# Altium PCB PCB1.PcbDoc
Units mil, origin at the board's own origin, x right, y up, seen from the top; angles counter-clockwise.
Board outline 3937.01 x 1968.5 mil, 2 copper layers (Top Layer, Bottom Layer); 61 components, 56 nets, 212 pads, 57 vias.
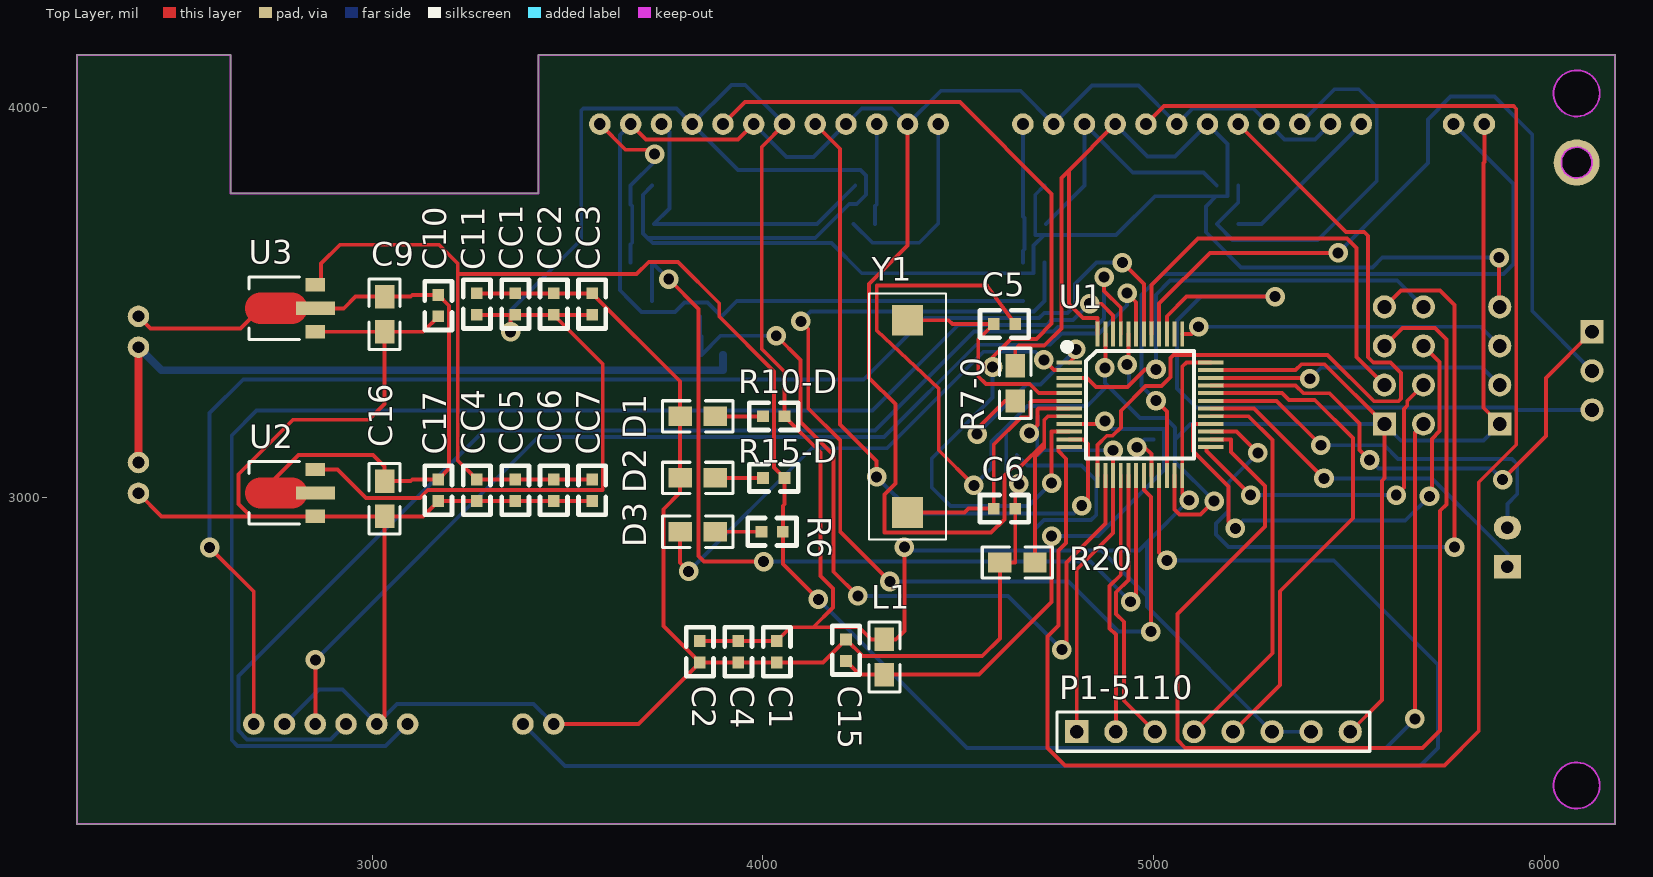
[diagram p0: Top Layer view]
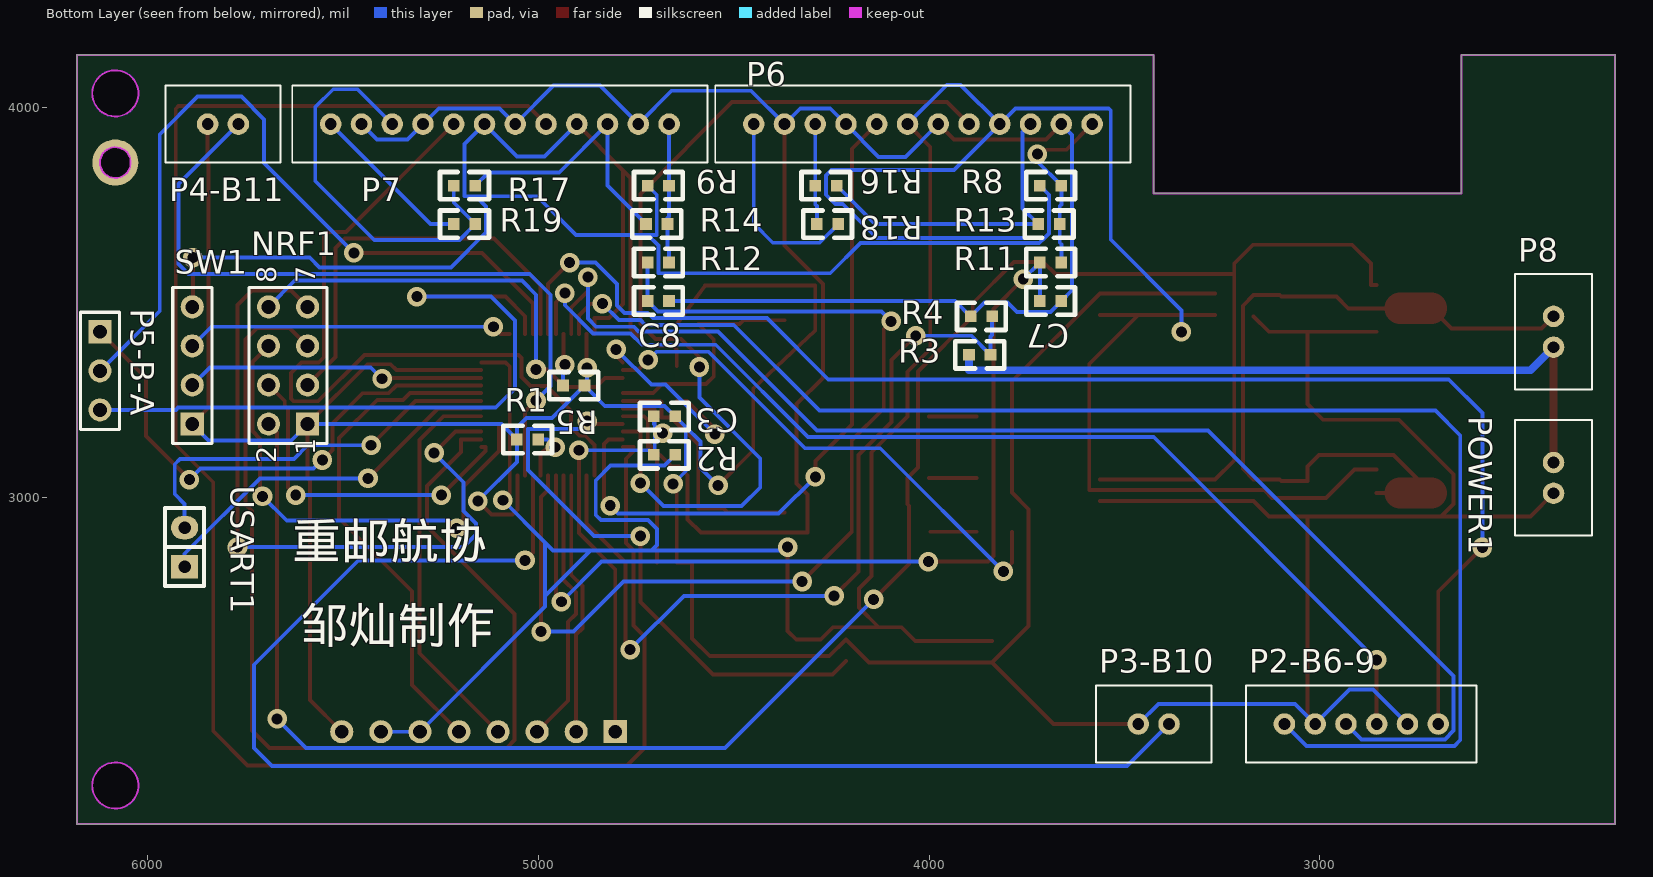
[diagram p1: Bottom Layer view, seen from below]

## Layer stack, top to bottom
Top Solder: solder mask 0.4, Solder Resist, Dk 3.5
Top Layer: signal copper 1.4
Dielectric 1: dielectric 12.6, FR-4, Dk 4.8
Bottom Layer: signal copper 1.4
Bottom Solder: solder mask 0.4, Solder Resist, Dk 3.5

## Board outline
2244.09,2165.35 2244.09,4133.86 2637.8,4133.86 2637.8,3779.53 3425.2,3779.53 3425.2,4133.86 6181.1,4133.86 6181.1,2165.35

## Design rules (kind name [scope] priority, off if disabled: settings)
Clearance [All] p1: gap=7
PolygonConnect [All] p1: connectstyle=Relief reliefconductorwidth=10 reliefentries=4 polygonreliefangle="90 Angle" airgapwidth=10
RoutingVias [All] p1: holewidth=28 width=50 viastyle="Through Hole" minholewidth=28 minwidth=50 maxholewidth=28 maxwidth=50
SolderMaskExpansion [All] p1: expansion=4
UnpouredPolygon [All] p1: allowunpoured=FALSE
Width [All] p1: maxlimit=30 minlimit=10 preferedwidth=30
29 further rules are at their usual default settings.

## Components (designator, comment, footprint, x,y, rotation, side; value= is the part's Value field where it differs from the comment)
C1 "cap" 0603c 4035.43,2578.74 r90 top
C2 "cap" 0603c 3838.58,2578.74 r90 top
C3 "cap" 0603c 4649.72,3208.66 r0 bottom
C4 "cap" 0603c 3937.01,2578.74 r90 top
C5 "cap" 0603c 4645.67,3444.88 r180 top
C6 "cap" 0603c 4645.67,2972.44 r180 top
C7 "cap" 0603c 3661.42,3503.94 r0 bottom
C8 "cap" 0603c 4665.35,3503.94 r0 bottom
C9 "cap" 0805 3031.5,3425.2 r90 top
C10 "cap" 0603c 3169.29,3464.57 r90 top
C11 "cap" 0603c 3267.72,3523.62 r270 top
C15 "cap" 0603c 4212.6,2637.8 r270 top
C16 "cap" 0805 3031.5,2952.76 r90 top
C17 "cap" 0603c 3169.29,2992.13 r90 top
CC1 "cap" 0603c 3366.14,3523.62 r270 top
CC2 "cap" 0603c 3464.57,3523.62 r270 top
CC3 "cap" 0603c 3562.99,3523.62 r270 top
CC4 "cap" 0603c 3267.72,2992.13 r90 top
CC5 "cap" 0603c 3366.14,2992.13 r90 top
CC6 "cap" 0603c 3464.57,2992.13 r90 top
CC7 "cap" 0603c 3562.99,2992.13 r90 top
D1 "LED0" 0805 3877.95,3208.66 r180 top
D2 "LED0" 0805 3877.95,3051.18 r180 top
D3 "LED0" 0805 3877.95,2913.39 r180 top
L1 "Inductor" 0805 4311.02,2637.8 r270 top
NRF1 "Header 4X2" HDR2X4 5590.55,3188.98 r90 bottom
P1-5110 "Header 8" HDR1X8 4803.15,2401.57 r0 top
P2-B6-9 "Header 6" 6p 2893.7,2421.26 r0 bottom
P3-B10 "Header 2" 2p 3425.2,2421.26 r0 bottom
P4-B11 "Header 2" 2p 5807.09,3956.69 r0 bottom
P5-B-A "Header 3" HDR1X3 6122.05,3425.2 r270 bottom
P6 "Header 12" 12p 4015.75,3956.69 r0 bottom
P7 "Header 12" 12p 5098.43,3956.69 r0 bottom
P8 "Header 2" 2p 2401.57,3425.2 r90 bottom
POWER1 "CON2" 2p 2401.57,3051.18 r90 bottom
R1 "res" 0603c 5000,3149.61 r0 bottom
R2 "10K" 0603c 4704.72,3110.24 r180 bottom
R3 "10K" 0603c 3842.64,3366.14 r0 bottom
R4 "10K" 0603c 3893.58,3464.57 r180 bottom
R5 "res" 0603c 4881.89,3287.4 r0 bottom
R6 "1K" 0603c 3996.06,2913.39 r0 top
R7-0 "0R" 0805 4645.67,3248.03 r90 top
R8 "10K" 0603c 3661.42,3799.21 r0 bottom
R9 "10K" 0603c 4665.35,3799.21 r0 bottom
R10-D "res" 0603c 4055.12,3208.66 r180 top
R11 "1K" 0603c 3661.42,3602.36 r0 bottom
R12 "1K" 0603c 4665.35,3602.36 r0 bottom
R13 "10K" 0603c 3720.47,3700.79 r180 bottom
R14 "10K" 0603c 4724.41,3700.79 r180 bottom
R15-D "res" 0603c 4055.12,3051.18 r180 top
R16 "10K" 0603c 4291.34,3799.21 r180 bottom
R17 "10K" 0603c 5216.54,3799.21 r180 bottom
R18 "10K" 0603c 4232.28,3700.79 r0 bottom
R19 "10K" 0603c 5216.54,3700.79 r180 bottom
R20 "0R" 0805 4606.3,2834.65 r0 top
SW1 "Header 4" HDR1X4 5885.83,3188.98 r90 bottom
U1 "STM32F103C8T6" LQFP48S 4783.46,3346.46 r0 top
U2 "XC6203E" SOT-89 2854.33,2952.76 r90 top
U3 "XC6203E" SOT-89 2854.33,3425.2 r90 top
USART1 "CON2" SIP2 5905.51,2874.02 r90 bottom
Y1 "5032xtal" 晶振 4370.08,3208.66 r90 top

## Footprints (in the part's own frame and the unit in brackets; to place one, negate y for a bottom-side part, rotate by r counter-clockwise, add the part's x,y. Pads: shape width x height; smd on the part's side, far side on the other; paste and mask are expansions set on the pad)
2p [mil]
  round 55 hole 30: 1(-39.37,0) 2(39.37,0)
  silkscreen extent -148,-98 148,98
6p [mil]
  round 55 hole 30: 1(-196.85,0) 2(-118.11,0) 3(-39.37,0) 4(39.37,0) 5(118.11,0) 6(196.85,0)
  silkscreen extent -295,-98 295,98
12p [mil]
  round 55 hole 30: 1(-433.07,0) 2(-354.33,0) 3(-275.59,0) 4(-196.85,0) 5(-118.11,0) 6(-39.37,0) 7(39.37,0) 8(118.11,0) 9(196.85,0) 10(275.59,0) 11(354.33,0) 12(433.07,0)
  silkscreen extent -531,-98 531,98
0603c [mil]
  rect 30x30 smd: 1(0,0) 2(55,0)
  silkscreen extent -35,-35 90,35
0805 [mil]
  rect 60x50 smd: 1(0,0) 2(90,0)
  silkscreen extent -45,-40 135,40
HDR1X3 [mm] "Connector; Header; 3 Position"
  rect 1.5x1.5 hole 0.9: 1(0,0)
  round 1.5 hole 0.9: 2(2.54,0) 3(5.08,0)
  silkscreen extent -1.27,-1.27 6.35,1.27
HDR1X4 [mm] "Connector; Header; 4 Position"
  rect 1.5x1.5 hole 0.9: 1(0,0)
  round 1.5 hole 0.9: 2(2.54,0) 3(5.08,0) 4(7.62,0)
  silkscreen extent -1.27,-1.27 8.89,1.27
HDR1X8 [mm] "Connector; Header; 8 Position"
  rect 1.5x1.5 hole 0.9: 1(0,0)
  round 1.5 hole 0.9: 2(2.54,0) 3(5.08,0) 4(7.62,0) 5(10.16,0) 6(12.7,0) 7(15.24,0) 8(17.78,0)
  silkscreen extent -1.27,-1.27 19.05,1.27
HDR2X4 [mm] "Connector; Header; 4x2 Position"
  rect 1.5x1.5 hole 0.9: 1(0,0)
  round 1.5 hole 0.9: 2(0,2.54) 3(2.54,0) 4(2.54,2.54) 5(5.08,0) 6(5.08,2.54) 7(7.62,0) 8(7.62,2.54)
  silkscreen extent -1.27,-1.27 8.89,3.81
LQFP48S [mil] "DPIN-0.5"
  rect 65x10 smd: 1(0.43,0.29) 2(0.43,-19.39) 3(0.43,-39.08) 4(0.43,-58.76) 5(0.43,-78.45) 6(0.43,-98.13) 7(0.43,-117.82) 8(0.43,-137.5) 9(0.43,-157.19) 10(0.43,-176.87) 11(0.43,-196.56) 12(0.43,-216.24) 25(362.63,-216.24) 26(362.63,-196.56) 27(362.63,-176.87) 28(362.63,-157.19) 29(362.63,-137.5) 30(362.63,-117.82) 31(362.63,-98.13) 32(362.63,-78.45) 33(362.63,-58.76) 34(362.63,-39.08) 35(362.63,-19.39) 36(362.63,0.29)
  rect 10x65 smd: 13(73.26,-289.08) 14(92.95,-289.08) 15(112.63,-289.08) 16(132.32,-289.08) 17(152,-289.08) 18(171.69,-289.08) 19(191.37,-289.08) 20(211.06,-289.08) 21(230.74,-289.08) 22(250.43,-289.08) 23(270.11,-289.08) 24(289.8,-289.08) 37(289.8,73.13) 38(270.11,73.13) 39(250.43,73.13) 40(230.74,73.13) 41(211.06,73.13) 42(191.37,73.13) 43(171.69,73.13) 44(152,73.13) 45(132.32,73.13) 46(112.63,73.13) 47(92.95,73.13) 48(73.26,73.13)
  silkscreen extent -10,-246 319,46
SIP2 [mil]
  rect 60x70 hole 32: 1(-50,0)
  oval 60x70 hole 32: 2(50,0)
  silkscreen extent -100,-50 100,50
SOT-89 [mil]
  rect 34x50 smd: 1(0,0) 3(120,0)
  rect 34x100 smd: 2(60,0)
  Top Layer lines w80: 60,140 60,60
  silkscreen extent -20,40 140,170
晶振 [mm]
  rect 2x2 smd: 1(-6.25,0) 2(6.25,0)
  silkscreen extent -8,-2.5 8,2.5

## Part data
D1 D2 D3: "Typical INFRARED GaAs LED"
NRF1: "Header, 4-Pin, Dual row"
P1-5110: "Header, 8-Pin"
P2-B6-9: "Header, 6-Pin"
P3-B10 P4-B11 P8: "Header, 2-Pin"
P5-B-A: "Header, 3-Pin"
P6 P7: "Header, 12-Pin"
R2 R3 R4 R6 R7-0 R8 R9 R11 R12 R13 R14 R16 R17 R18 R19 R20: library part RES
SW1: "Header, 4-Pin"
U2 U3: library part XC6203

## Free pads (board coordinates)
  round 118.11 hole 118.11: 0(6082.68,4035.43) 1(6082.68,2263.78)
  round 118.11 hole 78.74: 2(6082.68,3858.27)

## Via types
v1: diameter 50, hole 28, Top Layer to Bottom Layer, 57 vias

## Nets (pads, with @x,y where several pads share a name; then routed paths per layer and width w, separated by ;. In a path a pad name is that pad's centre, name@x,y a point inside that pad or via, vN(x,y) a via of type N, cw(c..) or ccw(c..) an arc to the next point about the centre after c; other vN are vias at no path point)
3.3_2: CC4.2 CC5.2 CC6.2 CC7.2 NRF1.2 R6.2 R15-D.1 U3.3 | length 5399.1
  Top Layer w10: U3.3 2869,3545.2 2869,3600 2917,3648 3171,3648 3219,3600 3219,3573 ; CC7.2 CC6.2 CC5.2 CC4.2 3219,3095.84 3219,3573 ; v1(4142,2740) 4051.06,2830.94 R6.2 4051.06,2980 4055.12,2984.05 R15-D.1 4028,3078.3 4028,3324 3888.24,3463.76 3888.24,3498.18 3782.14,3604.28 3707.72,3604.28 3676.45,3573 3219,3573 ; v1(5668.73,2434.17) 5668.73,3167.15 NRF1.2
  Bottom Layer w10: v1(4142,2740) 4522,2360 5594.55,2360 v1(5668.73,2434.17)
3.3V: C1.2 C2.2 C4.2 C11.2 CC1.2 CC2.2 CC3.2 L1.1 P1-5110.6 P1-5110.7 P6.4 P6.7 P7.4 P7.7 R2.2 R7-0.2 R8.2 R9.2 R10-D.1 SW1.4 U1.24 U1.36 U1.48 U2.3 | length 13739.9
  Top Layer w10: U2.3 2911.24,3072.76 2984,3000 3122,3000 3142,3020 3590,3020 3590,3343.19 CC2.2 ; C11.2 CC1.2@3354,3468.62 ; v1(3354,3425) CC1.2@3354,3468.62 ; CC3.2 CC2.2 ; C2.2 C4.2 C1.2 4070.69,2669 4128.69,2669 ; P6.7 3997,3898.57 3997,3381 4055.12,3322.88 R10-D.1 4146.9,3116.88 4146.9,2800 4179,2767.9 4179,2719.31 4128.69,2669 ; v1(4362,2874) 4362,2659.8 4340,2637.8 L1.1 4277.2,2637.8 4246,2669 4128.69,2669 ; R7-0.2 4645.67,3380 4655.67,3390 4720,3390 4764,3434 4764,3819.12 4783,3838.12 ; U1.48 4856.72,3460 4819,3460 4783,3496 4783,3838.12 ; P7.4 4783,3838.12 ; v1(5091,2994) 5073.26,3011.74 U1.24 5073.26,3336.01 5084,3346.75 U1.36 ; v1(5884,3615) 5884,3490.8 SW1.4 ; CC1.2@3354,3468.62 CC1.2 CC2.2
  Bottom Layer w10: v1(3354,3425) 3354,3480 3535,3661 3535,3992 3540,3997 3778.59,3997 P6.4 ; R8.2 3693,3775.79 3693,3677 3705,3665 ; P6.7 3954.81,4057 3919.21,4057 P6.4 ; v1(4362,2874) 4371.02,2864.98 4867.02,2864.98 4983,2749 ; R2.2 4676.96,3083 4815,3083 4853,3045 4853,2956 4840,2943 4719,2943 4696,2920 4696,2879 4710,2865 4962,2865 4983,2886 ; R9.2 4697,3775.86 4697,3673 4720,3673 ; P7.4 4984.27,3874 5055.1,3874 P7.7 5189,3905.49 5189,3772 5160,3772 ; v1(5091,2994) 4983,2886 ; P1-5110.7 P1-5110.6 4983,2721.72 4983,2749 ; v1(5884,3615) 5585.11,3615 5560.08,3589.97 5224.03,3589.97 5134,3680 5134,3746 5160,3772 ; 3705,3665 4134,3665 4221,3752 4240,3752 4264,3776 4264,3825 4250,3839 3936.59,3839 P6.4 ; 3705,3665 3718,3652 4176,3652 4253,3575 4693,3575 4693,3646 4720,3673 ; 4720,3673 4904,3673 5003,3772 5160,3772 ; 4983,2749 4983,2886
ADC_KEY_L: C7.2 R11.2 U1.18 | length 2382.4
  Top Layer w10: v1(3759,3559.78) 3835,3483.78 3835,2851 3849,2837 v1(4002,2837) ; v1(4941,2734.15) 4955.15,2748.3 U1.18
  Bottom Layer w10: C7.2 R11.2 v1(3759,3559.78) ; v1(4002,2837) 4838.15,2837 v1(4941,2734.15)
ADC_KEY_R: C8.2 R12.2 U1.19 | length 2631.7
  Top Layer w10: v1(4097,3452) 4116,3433 4116,3229 4198,3147 4198,2913 v1(4325,2786) ; U1.19 4974.83,3020 4993,3001.83 v1(4993,2658)
  Bottom Layer w10: v1(4097,3452) 4121.94,3476.94 4693.35,3476.94 C8.2 R12.2 ; v1(4325,2786) 4782.18,2786 4910.18,2658 v1(4993,2658)
ADC_PITCH: P7.5 U1.12 | length 4587.9
  Top Layer w10: U1.12 4756,3130.21 4756,3120.24 4776,3100.24 4776,2885 4756,2865 4756,2673 4728,2645 4728,2360 4773,2315 5744,2315 5832,2403 5832,3040 5928,3136 5928,3996 5921,4003 5026.62,4003 P7.5
ADC_POWER: R3.1 R4.2 U1.14 | length 2135.3
  Top Layer w10: v1(4034,3415) 4096.56,3352.44 4096.56,3193.87 4181,3109.43 4181,2811 v1(4243,2749) ; v1(4765,2611.5) 4776.5,2623 4776.5,2835.08 4876.41,2934.99 U1.14
  Bottom Layer w10: R4.2 3838.58,3417.06 3842.64,3413 R3.1 3891.5,3415 v1(4034,3415) ; v1(4243,2749) 4627.5,2749 v1(4765,2611.5)
ADC_ROLL: P7.8 U1.13 | length 1984.1
  Top Layer w10: U1.13 4856.72,3135.72 4880,3159 4895,3159 4916,3180 4916,3223 4979,3286 5020,3286 5043,3309 5043,3358 5051,3366 5445,3366 5563.55,3247.45 5626.45,3247.45 5633,3254 5633,3320 5606,3347 5562.01,3347 5549,3360.01 5549,3670.95 5538.95,3681 5492.23,3681 P7.8
ADC_THR: P6.5 U1.10 | length 2406.1
  Top Layer w10: P6.5 3953.95,4013 4504,4013 4739,3778 4739,3445.88 4700.12,3407 4635,3407 4588,3360 v1(4588,3335) ; v1(4739,3038) 4739,3169.58 U1.10
  Bottom Layer w10: v1(4588,3335) 4588,3257 4432,3101 4432,3027 4480,2979 4680,2979 v1(4739,3038)
ADC_YAW: P6.8 U1.11 | length 1757.6
  Top Layer w10: P6.8 4196.96,3893.59 4196.96,3188.04 4291,3094 v1(4291,3054) ; U1.11 4820,3149.9 4832,3137.9 4832,2996.08 v1(4815.92,2980)
  Bottom Layer w10: v1(4291,3054) 4385,2960 4795.92,2960 v1(4815.92,2980)
AGND: C7.1 C8.1 P6.2 P6.6 P6.9 P6.11 P7.2 P7.6 P7.9 P7.11 R4.1 R20.2 U1.8 | length 5815
  Top Layer w10: P6.2 3701.11,3917 3936.69,3917 P6.6 ; P6.11 4370.08,3646.09 4271.65,3547.66 4271.65,3307.35 4339,3240 4339,3036.5 4311.5,3009 4311.5,2911 4584,2911 4618,2945 4618,3057.85 4640,3079.85 4658.85,3079.85 4720,3141 ; R20.2 4696.3,3105.3 4720,3129 4720,3141 ; U1.8 4730,3208.95 4720,3198.95 4720,3141
  Bottom Layer w10: P6.2 3634,3929.27 3634,3531.36 C7.1 3689.36,3476 3775,3476 3799,3500 3858.15,3500 R4.1 3932.95,3503.94 C8.1 ; P6.6 4060.07,3873 4128.91,3873 P6.9 4252.91,3997 4329.77,3997 P6.11 4455.39,4042 4658.79,4042 P7.2 4842.4,4055 4960.75,4055 P7.6 5099.36,3997 5254.97,3997 P7.9 5334.97,3917 5413.06,3917 P7.11
AVDD: C15.2 L1.2 U1.9 | length 1504.1
  Top Layer w10: C15.2 4247.6,2547.8 L1.2 4552.8,2547.8 4739,2734 v1(4739,2902) ; U1.9 4867.66,3189.27 v1(4875,3196.61)
  Bottom Layer w10: v1(4739,2902) 4858,2902 5027,3071 5027,3176.61 4895,3176.61 v1(4875,3196.61)
BAT: P8.1 POWER1.2 R3.2 | length 1855.2
  Top Layer w20: POWER1.2 P8.1
  Bottom Layer w20: P8.1 2460.63,3326.77 3897.64,3326.77 R3.2
BOOT0: R5.2 U1.44 | length 135.6
  Top Layer w10: v1(4932,3341) 4935.46,3344.46 U1.44
  Bottom Layer w10: v1(4932,3341) 4936.89,3336.11 R5.2
BOOT1: R1.1 U1.20 | length 150.8
  Top Layer w10: v1(4957,3129.61) 4977,3129.61 4994.52,3112.09 U1.20
  Bottom Layer w10: v1(4957,3129.61) 4977,3149.61 R1.1
CE: P1-5110.2 U1.16 | length 674.4
  Top Layer w10: P1-5110.2 4903.15,2649.85 4887,2666 4887,2774 4915.78,2802.78 U1.16
CLK: P1-5110.5 U1.32 | length 1290.1
  Top Layer w10: U1.32 5328.82,3268.01 5346.09,3250.74 5412.26,3250.74 5510,3153 5510,2948 5323,2761 5323,2521.42 P1-5110.5
DC: P1-5110.3 U1.17 | length 709.9
  Top Layer w10: U1.17 4935.46,2789.93 4904,2758.46 4904,2703 4924,2683 4924,2480.72 P1-5110.3
DGND: C1.1 C2.1 C3.1 C4.1 C5.1 C6.1 C9.1 C10.1 C11.1 C15.1 C16.1 C17.1 CC1.1 CC2.1 CC3.1 CC4.1 CC5.1 CC6.1 CC7.1 D1.2 D2.2 NRF1.1 P1-5110.8 P2-B6-9.2 P2-B6-9.5 P3-B10.2 P4-B11.2 POWER1.1 R1.2 R5.1 R20.1 SW1.1 U1.23 U1.35 U1.47 U2.1 U3.1 | length 12193.7
  Top Layer w10: POWER1.1 2460.63,2952.76 2689.24,2952.76 ; U3.1 C9.1 ; P2-B6-9.5 3031.5,2440.94 C16.1 ; C10.1 3129.92,3425.2 C9.1 ; C11.1 CC1.1 CC2.1 CC3.1 3787.95,3298.66 D1.2 D2.2 3787.95,3013.95 3745,2971 3745,2672.32 C2.1 ; P3-B10.2 3681.1,2421.26 C2.1 ; CC7.1 CC6.1 CC5.1 CC4.1 C17.1 3129.92,2952.76 C16.1 ; v1(4540,3032) 4450,3122 4450,3280 4291.34,3427.84 4291.34,3543.31 4573.31,3543.31 C5.1 ; v1(4655,3036) 4645.67,3026.67 C6.1 4645.67,2834.65 R20.1 4606.3,2640 4561.3,2595 4255.39,2595 C15.1 4153.54,2578.74 C1.1 C4.1 C2.1 ; v1(4875,3333) 4876.41,3334.41 U1.47 ; U1.23 5053.57,2970 5066.57,2957 5120,2957 v1(5155,2992) ; U1.35 5363.09,3327.06 5378.02,3342 5437.53,3342 NRF1.1 5590.55,3050.55 5584,3044 5584,2482.42 P1-5110.8 ; P4-B11.2 5846.46,3859.46 5844,3857 5844,3230.8 SW1.1 ; 2689.24,2952.76 2657.48,2984.52 2657.48,3060.48 2797,3200 2991.5,3200 3031.5,3240 C9.1 ; 2689.24,2952.76 U2.1 C16.1
  Bottom Layer w10: P2-B6-9.2 2863.66,2509.33 2923.74,2509.33 P2-B6-9.5 3063.55,2473 3412.83,2473 P3-B10.2 ; v1(4540,3032) 4585,3077 4585,3143.94 4622.72,3181.66 ; v1(4655,3036) 4622.72,3068.28 4622.72,3181.66 ; v1(4875,3333) 4875,3294.29 R5.1 ; v1(5155,2992) 5055,3092 R1.2 ; SW1.1 5843.85,3147 5632.53,3147 NRF1.1 5094.37,3188.98 R1.2 ; 4622.72,3181.66 C3.1 4676.72,3235.66 4830.15,3235.66 R5.1 ; R5.1 4964.64,3204.65 5030,3204.65 5055,3179.65 R1.2
DIN: P1-5110.4 U1.29 | length 1012.6
  Top Layer w10: P1-5110.4 5304,2602.42 5304,3147.75 5242.8,3208.95 U1.29
KEY_1: P6.1 R8.1 R11.1 R13.2 | length 478.6
  Top Layer w10: P6.1 3648.37,3891 3712,3891 v1(3723,3880)
  Bottom Layer w10: R11.1 3661.42,3649 3665.47,3653.05 R13.2 3665.47,3747 3661.42,3751.05 R8.1 3723,3860.79 v1(3723,3880)
KEY_2: P6.3 R13.1 R16.2 | length 837.5
  Bottom Layer w10: P6.3 3760.42,3936.43 3760.42,3740.73 R13.1 4137.91,3700.79 R16.2
KEY_3: P6.10 R16.1 R18.2 | length 257.6
  Bottom Layer w10: R18.2 4287.28,3747 4291.34,3751.05 R16.1 P6.10
KEY_4: P6.12 R18.1 | length 511.4
  Bottom Layer w10: R18.1 4280.07,3653 4400,3653 4448.82,3701.82 P6.12
KEY_5: P7.1 R9.1 R12.1 R14.2 | length 357.7
  Bottom Layer w10: R12.1 4665.35,3632.31 4669.41,3636.36 R14.2 4669.41,3716.16 4665.35,3720.22 R9.1 P7.1
KEY_6: P7.3 R14.1 R17.2 | length 700.6
  Bottom Layer w10: R14.1 4822.83,3799.21 P7.3 4946.53,3833 5127.75,3833 R17.2
KEY_7: P7.10 R17.1 R19.2 | length 1052.1
  Bottom Layer w10: R17.1 5216.54,3755.79 R19.2 5202.32,3660 5420,3660 5571,3811 5571,4000 5525,4046 5463.32,4046 P7.10
KEY_8: P7.12 R19.1 | length 421
  Bottom Layer w10: R19.1 5275.59,3700.79 P7.12
KEYY: U1.38
LED0: D3.2 U1.2 | length 1336.6
  Top Layer w10: D3.2 3787.95,2834.05 v1(3810,2812) ; v1(4719,3353) 4744.94,3327.06 U1.2
  Bottom Layer w10: v1(3810,2812) 4125,3127 4318,3127 4565,3374 4698,3374 v1(4719,3353)
MISO: NRF1.7 U1.27 | length 1852.3
  Top Layer w10: U1.27 5212.42,3169.58 v1(5267,3115) ; NRF1.7 5632.58,3531 5733,3531 5770,3494 v1(5770,2874)
  Bottom Layer w10: v1(5267,3115) 5192,3040 5192,2966 5160,2934 5160,2906 5192,2874 v1(5770,2874)
MOSI: NRF1.6 U1.28 | length 1301
  Top Layer w10: U1.28 5101,3189.27 5101,3120 5192,3029 5192,2939 v1(5209,2922) ; NRF1.6 5732.08,3347.45 5732.08,3171.08 5712,3151 5712,3010 v1(5706,3004)
  Bottom Layer w10: v1(5209,2922) 5229,2942 5644,2942 v1(5706,3004)
NetC5_2: C5.2 U1.5 Y1.2 | length 625.7
  Top Layer w10: Y1.2 4475,3454.72 4484.84,3444.88 C5.2 4551,3405.21 4551,3311 4571,3291 4683,3291 4705.99,3268.01 U1.5
NetC6_2: C6.2 U1.6 Y1.1 | length 651.5
  Top Layer w10: Y1.1 4516,2962.6 4525.84,2972.44 C6.2 4590.67,3136.67 4660,3206 4685.15,3206 4685.15,3245.47 4688,3248.32 U1.6
NetD1_1: D1.1 R10-D.2 | length 122.2
  Top Layer w10: D1.1 R10-D.2
NetD2_1: D2.1 R15-D.2 | length 122.2
  Top Layer w10: D2.1 R15-D.2
NetD3_1: D3.1 R6.1 | length 118.1
  Top Layer w10: D3.1 R6.1
NetR7-0_1: R7-0.1 U1.1 | length 523.7
  Top Layer w10: v1(4548,3163) 4548,3176 4620.03,3248.03 R7-0.1 ; U1.1 4801,3363.86 v1(4801,3380)
  Bottom Layer w10: v1(4548,3163) 4674.93,3289.93 4710.93,3289.93 v1(4801,3380)
PA12: P5-B-A.1 U1.33 | length 1359.2
  Top Layer w10: U1.33 5363.09,3287.69 5383.04,3267.74 5449.69,3267.74 5527,3190.42 5527,3123 v1(5553,3097) ; v1(5893,3047) 6004,3158 6004,3307.15 P5-B-A.1
  Bottom Layer w10: v1(5553,3097) 5575,3075 5865,3075 v1(5893,3047)
PB3: P5-B-A.3 U1.39 | length 1878.3
  Top Layer w10: U1.39 5033.89,3465 5083.89,3515 v1(5311,3515)
  Bottom Layer w10: v1(5311,3515) 5121,3515 5060,3454 5060,3280 5109,3231 5922,3231 5927.8,3225.2 P5-B-A.3
PB4: P5-B-A.2 U1.40 | length 2025.9
  Top Layer w10: U1.40 5014.2,3497.2 5144,3627 v1(5472,3627)
  Bottom Layer w10: v1(5472,3627) 5702,3857 5702,3969 5760,4027 5872,4027 5969,3930 5969,3478.24 P5-B-A.2
PB6: P2-B6-9.1 U1.42 | length 3575.6
  Top Layer w10: v1(2584,2873) 2696.85,2760.15 P2-B6-9.1 ; v1(4920,3602) 4974.83,3547.17 U1.42
  Bottom Layer w10: v1(2584,2873) 2584,3217 2670,3303 4258,3303 4414.94,3459.94 4707.01,3459.94 4720,3472.93 4779.93,3472.93 4799,3492 4799,3547.49 4853.51,3602 v1(4920,3602)
PB7: P2-B6-9.3 U1.43 | length 2762.7
  Top Layer w10: P2-B6-9.3 v1(2854.33,2585.33) ; v1(4932,3524) 4955.15,3500.85 U1.43
  Bottom Layer w10: v1(2854.33,2585.33) 3425,3156 4310,3156 4546,3392 4735,3392 4764,3421 4860,3421 4932,3493 v1(4932,3524)
PB8: P2-B6-9.4 U1.45 | length 3305.1
  Top Layer w10: v1(4873,3565) 4873,3529.69 4915.78,3486.91 U1.45
  Bottom Layer w10: P2-B6-9.4 2893.57,2381.76 2680,2381.76 2657.35,2404.41 2657.35,2544.35 3286,3173 4287.06,3173 4540,3425.94 4743.35,3425.94 4755.42,3438 4852,3438 4873,3459 v1(4873,3565)
PB9: P2-B6-9.6 U1.46 | length 3715.2
  Top Layer w10: v1(4836,3497) 4866.22,3497 4896.09,3467.13 U1.46
  Bottom Layer w10: P2-B6-9.6 3034.05,2364.76 2655.59,2364.76 2640.35,2380 2640.35,3160 2703.7,3223.35 4280.41,3223.35 4500,3442.94 4726.35,3442.94 4738.42,3455 4794,3455 v1(4836,3497)
PB10: P3-B10.1 U1.21 | length 3648.7
  Top Layer w10: U1.21 5014.2,2860 v1(5034.2,2840)
  Bottom Layer w10: P3-B10.1 3493.09,2314 5682,2314 5728,2360 5728,2573 5461,2840 v1(5034.2,2840)
PB11: P4-B11.1 U1.22 | length 1895.4
  Top Layer w10: v1(5006,3249) 5033.89,3221.11 U1.22
  Bottom Layer w10: v1(5006,3249) 4969,3286 4969,3520 5021.97,3572.97 5894.97,3572.97 5921,3599 5921,3803.41 P4-B11.1
RST: C3.2 P1-5110.1 R2.1 U1.7 U1.15 | length 1258.6
  Top Layer w10: v1(4682,3166) 4703,3187 4703,3226 4705.64,3228.64 U1.7 ; P1-5110.1 4803.15,2817.06 4896.09,2910 U1.15 v1(4896.09,3122)
  Bottom Layer w10: v1(4682,3166) 4702,3186 ; v1(4896.09,3122) 4716.49,3122 R2.1 4702,3112.96 4702,3186 ; 4702,3186 4702,3205.94 C3.2 4704.72,3188.72 4702,3186
SWCLK: SW1.3 U1.37 | length 840.5
  Top Layer w10: U1.37 5096.58,3419.58 v1(5115,3438)
  Bottom Layer w10: v1(5115,3438) 5836.8,3438 SW1.3
SWDIO: SW1.2 U1.34 | length 771.4
  Top Layer w10: U1.34 5397.62,3307.38 v1(5400,3305)
  Bottom Layer w10: v1(5400,3305) 5429,3334 5840.8,3334 SW1.2
USART1_RX: U1.31 USART1.2 | length 1024.3
  Top Layer w10: U1.31 5314.5,3248.32 v1(5428.01,3134.81)
  Bottom Layer w10: v1(5428.01,3134.81) 5590.55,3134.81 5625.36,3100 5916.79,3100 5930.71,3086.08 5930.71,3009.71 5905.51,2984.51 USART1.2
USART1_TX: U1.30 USART1.1 | length 946.3
  Top Layer w10: U1.30 5257.36,3228.64 v1(5436,3050)
  Bottom Layer w10: v1(5436,3050) 5712.51,3050 5905.51,2857 USART1.1
VCC: C9.2 C10.2 C16.2 C17.2 P8.2 U2.2 U3.2 | length 1837.9
  Top Layer w10: P8.2 2432.14,3434 2663.13,3434 2714.33,3485.2 ; 2714.33,3012.76 2811.57,3110 3001.5,3110 3031.5,3080 C16.2 3098,3042.76 3102.37,3047.13 C17.2 3197,3074.83 3197,3491.86 C10.2 3102.37,3519.57 3098,3515.2 C9.2 2957,3515.2 2927,3485.2 U3.2 2794.33,3485.2 ; 2794.33,3012.76 U2.2
W_CE: NRF1.3 U1.41 | length 1089.8
  Top Layer w10: U1.41 4994.52,3545 5113.52,3664 5495,3664 5519,3640 5519,3360.53 NRF1.3
W_CSN: NRF1.4 U1.25 | length 864.9
  Top Layer w10: U1.25 5135,3130.21 5135,3120 v1(5248,3007) ; v1(5621,3007) 5641,3027 5641,3227.96 5649.08,3236.04 5649.08,3247.5 NRF1.4
  Bottom Layer w10: v1(5248,3007) v1(5621,3007)
W_IRQ: NRF1.8 U1.3 | length 1168.6
  Top Layer w10: U1.3 4829,3307.38 4852.38,3284 4933,3284 4978,3329 v1(5006,3329)
  Bottom Layer w10: v1(5006,3329) 5006,3520 5041.97,3555.97 5623.56,3555.97 NRF1.8
W_SCK: NRF1.5 U1.26 | length 2846.8
  Top Layer w10: U1.26 5198,3149.9 5198,3117 5285,3030 5285,2927 5061,2703 5061,2380 5081,2360 5688,2360 5733,2405 5733,2967 5749.08,2983.08 5749.08,3405.92 5720,3435 5636.58,3435 NRF1.5
pads on no net: U1.4

## Polygon pours and split planes (outlines as drawn)
DGND on Top Paste "Top Layer-No Net" (solid, remove dead copper, shelved): 2047.24,4429.13 1968.5,4350.39 1968.5,1791.34 6574.8,1791.34 6712.6,1929.13 6338.58,2303.15 6338.58,4311.02

## Keep-outs
Keep-Out Layer:
  circle w5: c6082.68,4035.43 r59.06
  circle w5: c6082.68,2263.78 r59.06
  circle w5: c6082.68,3858.27 r39.37
  lines w5: 2244.09,2165.35 2244.09,4133.86 2637.8,4133.86 2637.8,3779.53 3425.2,3779.53 3425.2,4133.86 6181.1,4133.86 6181.1,2165.35 2244.09,2165.35

## Silkscreen, mask and mechanical layers (free items; w line width, h text height)
Bottom Overlay:
  text "重邮航协" at 5629.92,2814.96 h157.48
  text "邹灿制作" at 5610.24,2598.43 h157.48

## Text inside footprints (layer, text, board x,y; h text height)
NRF1: Bottom Overlay "2" at 5670.55,3088.98 h50 r270; Bottom Overlay "1" at 5570.55,3108.98 h50 r270; Bottom Overlay "7" at 5570.55,3548.98 h50 r270; Bottom Overlay "8" at 5670.55,3548.98 h50 r270